# Altium PCB PCB1.PcbDoc
Units mm, origin at the board's own origin, x right, y up, seen from the top; angles counter-clockwise.
Board outline 83.69 x 43.94 mm, 2 copper layers (Top Layer, Bottom Layer); 27 components, 36 nets, 110 pads, 2 vias.
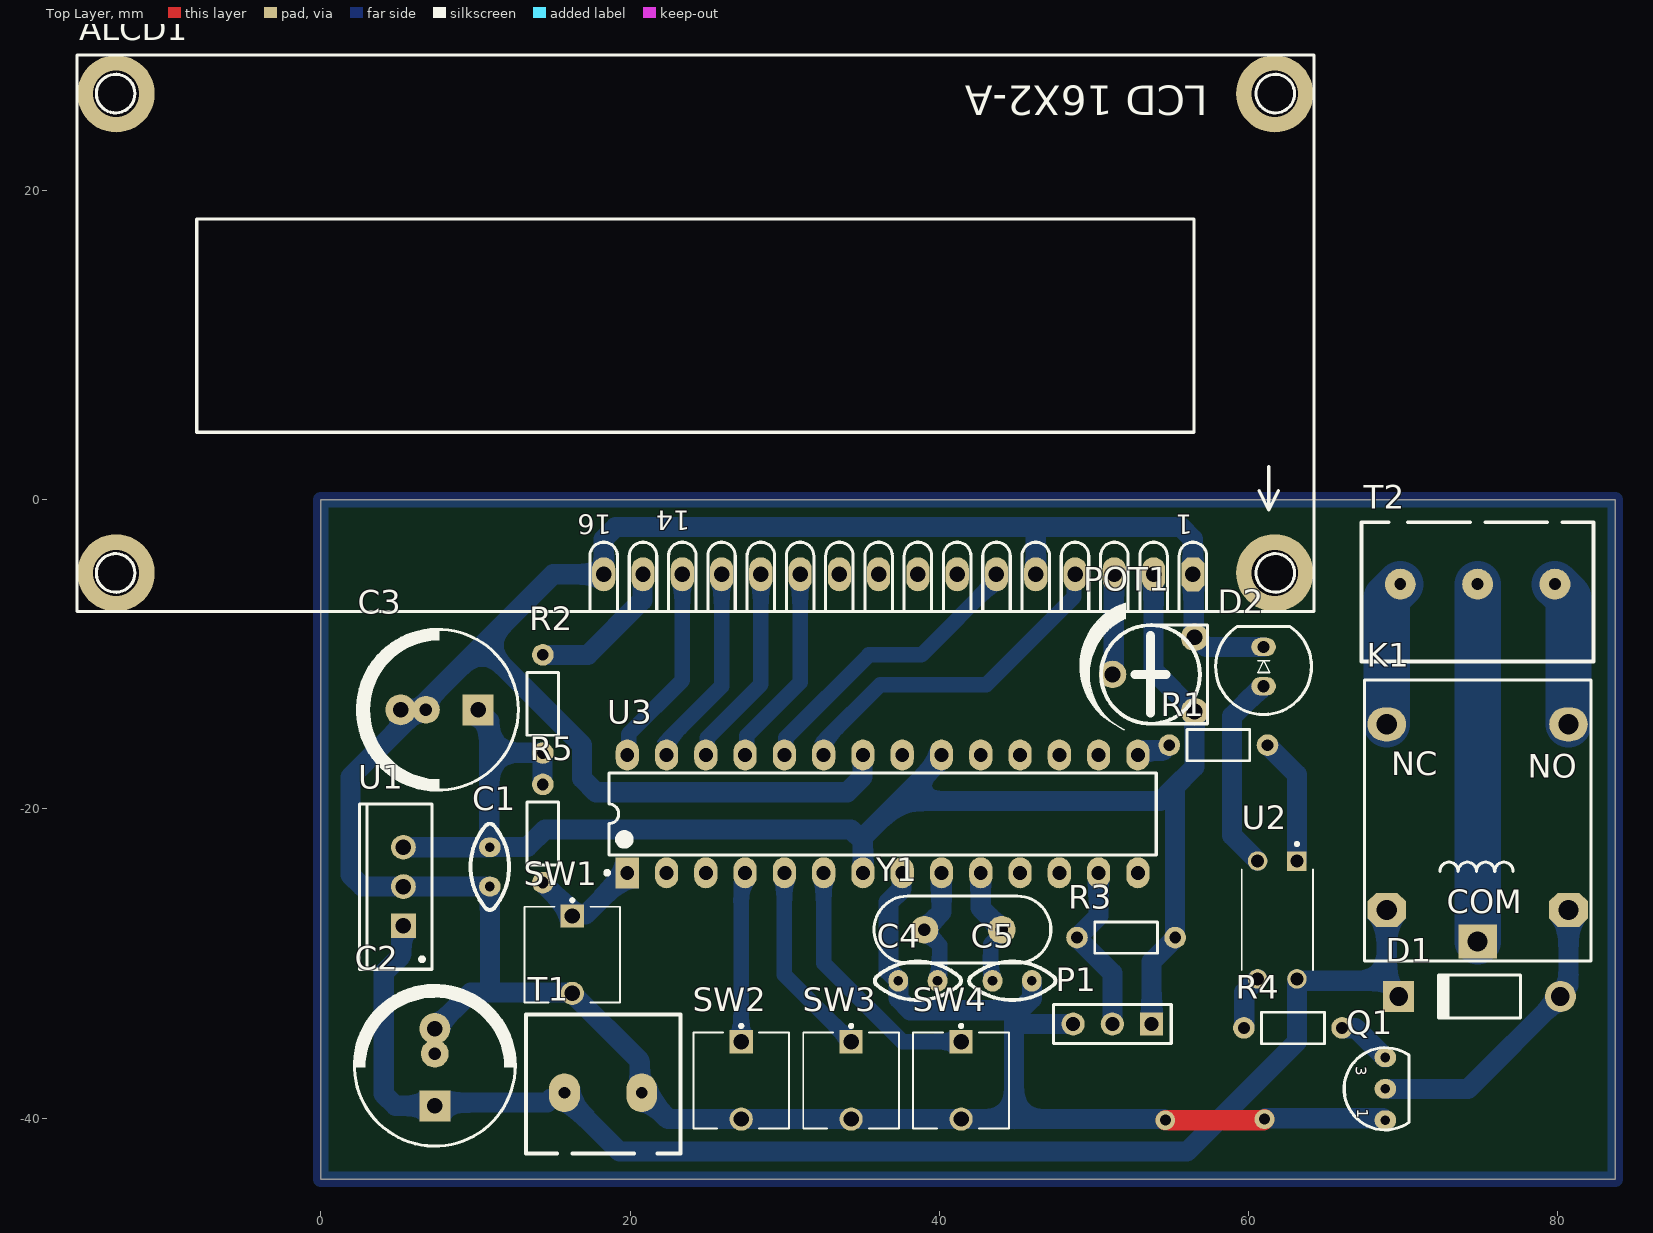
[diagram p0: Top Layer view]
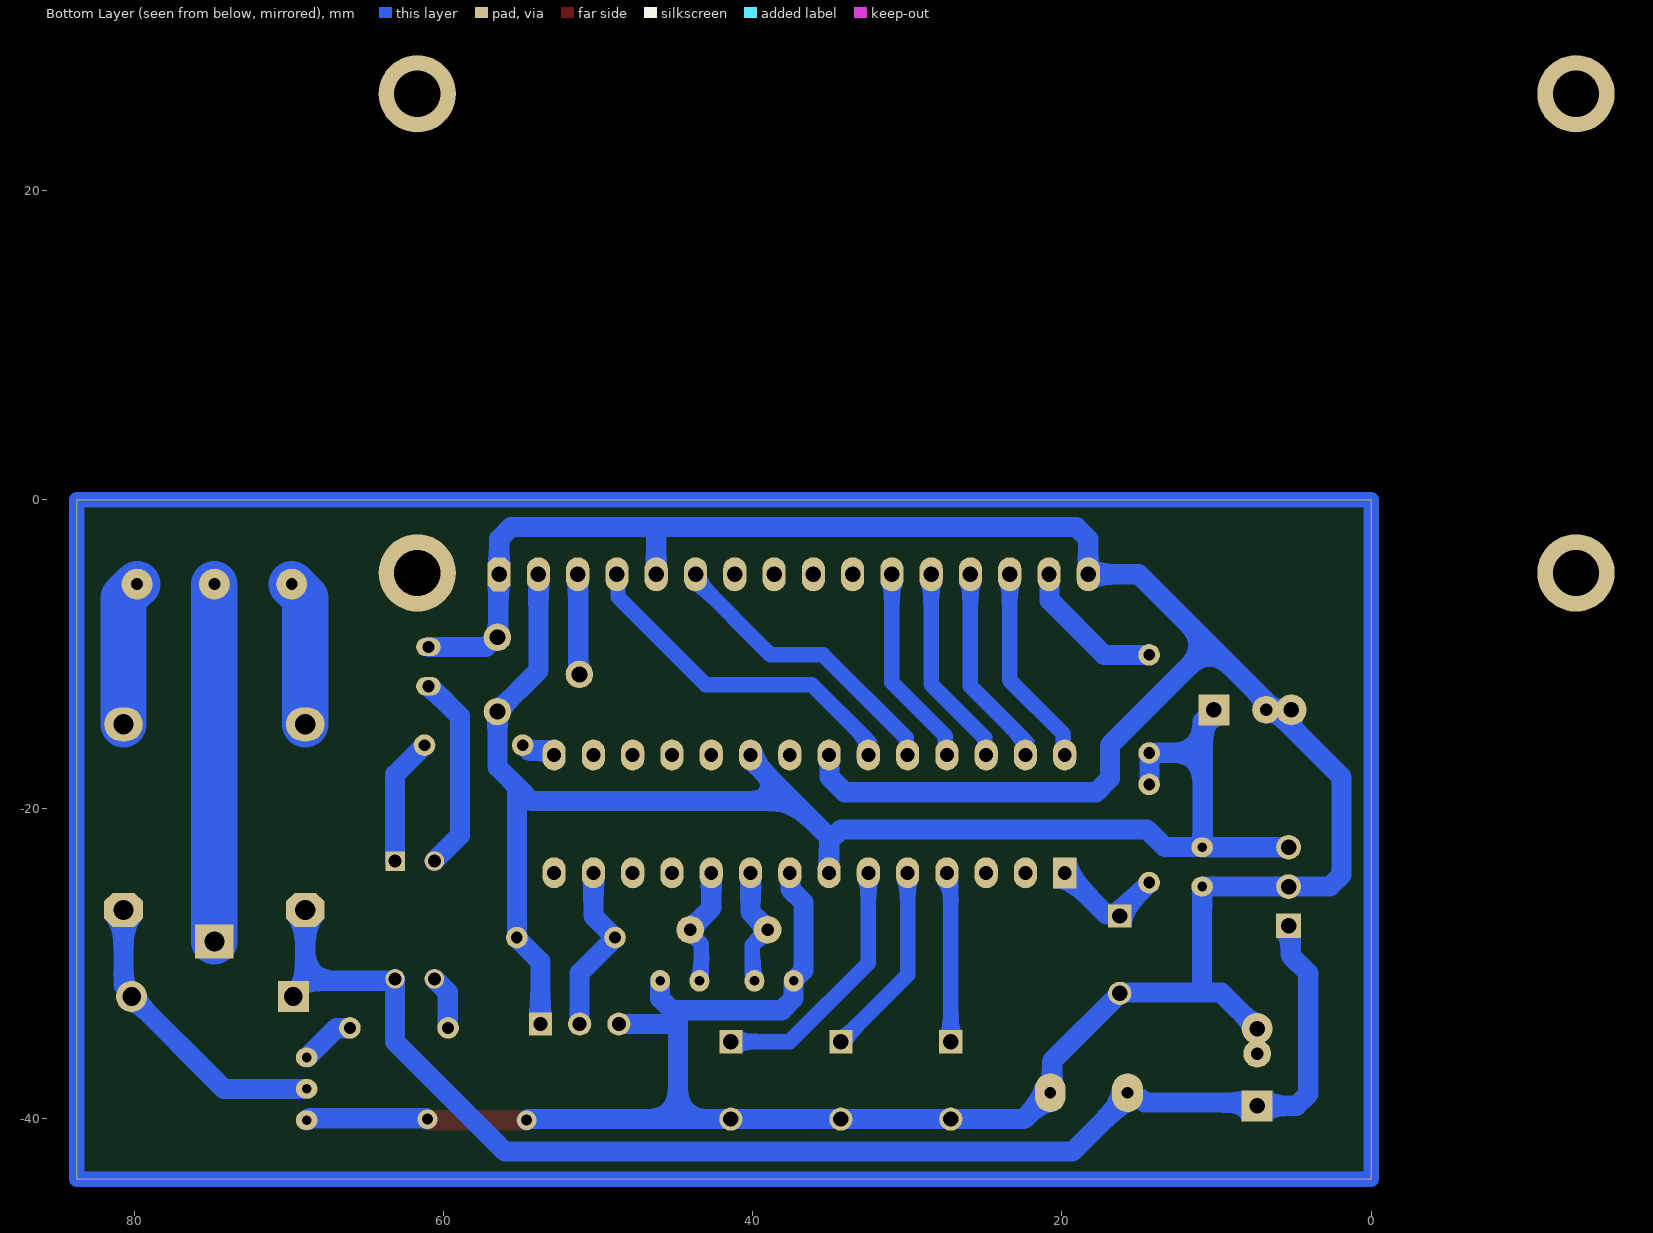
[diagram p1: Bottom Layer view, seen from below]
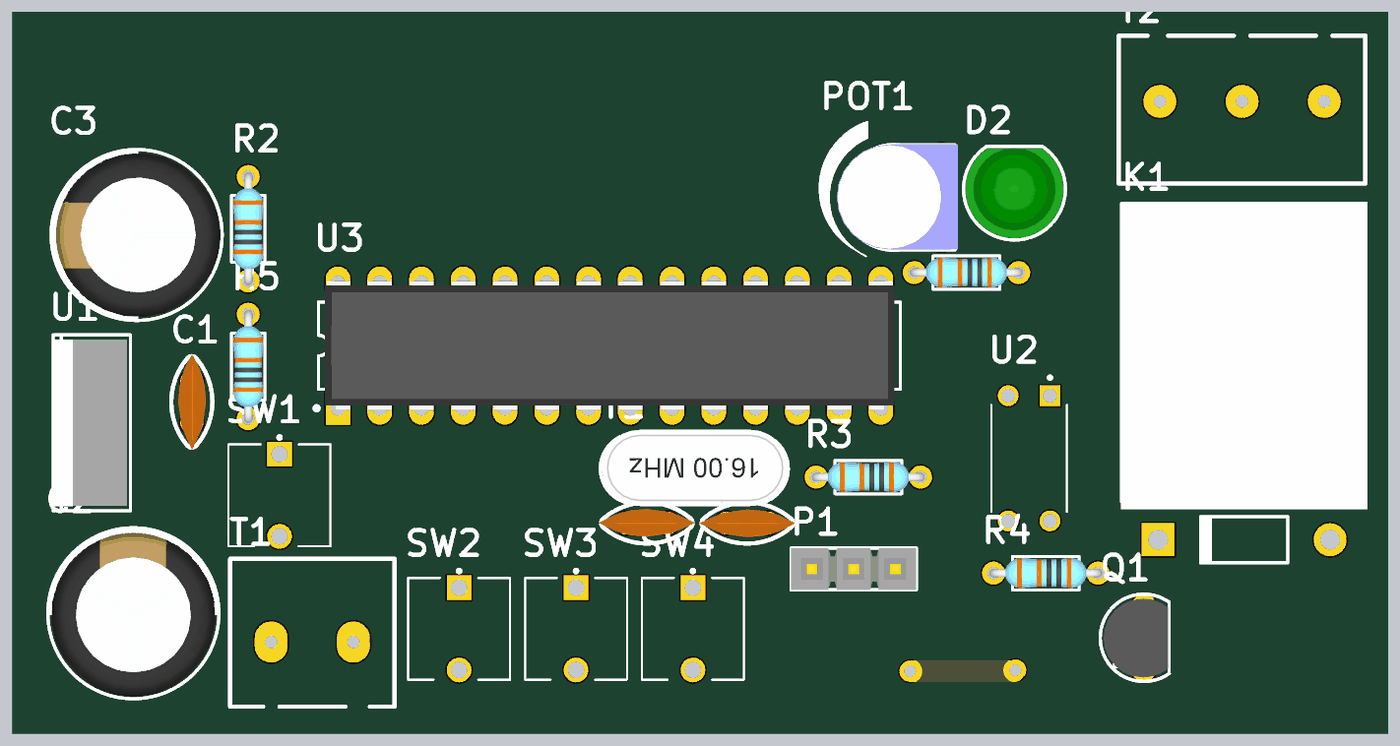
[diagram p2: 3D render of the assembled board from above, using the file's embedded part models]

## Layer stack, top to bottom
Top Solder: solder mask 0.0102, Solder Resist, Dk 3.5
Top Layer: signal copper 0.0356
Dielectric 1: dielectric 0.32, FR-4, Dk 4.8
Bottom Layer: signal copper 0.0356
Bottom Solder: solder mask 0.0102, Solder Resist, Dk 3.5

## Board outline
0,-43.942 83.693,-43.942 83.693,0 0,0

## Design rules (kind name [scope] priority, off if disabled: settings)
Clearance [All] p1: gap=0.254 ignorepadtopadclearanceinfootprint=FALSE except(0: Arc-Hole Track-Hole SMDPad-Hole THPad-Hole Via-Hole Fill-Hole Poly-Hole Region-Hole Text-Hole)
PolygonConnect [All] p1: connectstyle=Relief reliefconductorwidth=0.254 reliefentries=4 polygonreliefangle="90 Angle" airgapwidth=0.254
RoutingVias [All] p1: holewidth=0.711 width=1.27 viastyle="Through Hole" minholewidth=0.711 minwidth=1.27 maxholewidth=0.711 maxwidth=1.27
SolderMaskExpansion [All] p1: expansion=0.102 istentingtop=FALSE
Width [All] p1: maxlimit=3 minlimit=1 preferedwidth=1.3
30 further rules are at their usual default settings.

## Components (designator, comment, footprint, x,y, rotation, side; value= is the part's Value field where it differs from the comment)
ALCD1 "LCD" LCD_2X16 26.924,11.474 r180 top
C1 "100nF" Cap-100nF 10.922,-23.749 r90 top
C2 "1000uf" "Cap electrolitic radial 10x20-5" 7.366,-36.703 r90 top
C3 "1000uf" "Cap electrolitic radial 10x20-5" 7.66,-13.589 r180 top
C4 "22pf" Cap-100nF 38.608,-31.115 r180 top
C5 "22pf" Cap-100nF 44.704,-31.115 r0 top
D1 "Diode 1N4007" DO-41 74.93,-32.131 r180 top
D2 "LED 5MM" LED5MM_GRN 60.96,-10.795 r90 top
K1 "" "Relay 18.85x15.35x15.70" 74.803,-21.55 r0 top
P1 "Header 3" HDR1X3 53.721,-33.909 r180 top
POT1 "10K" "POT 4" 53.848,-11.303 r90 top
Q1 "C945" C945 68.834,-38.1 r270 top
R1 "1K" RES-(1/4) 58.039,-15.875 r180 top
R2 "220" RES-(1/4) 14.351,-13.208 r90 top
R3 "2.4K" RES-(1/4) 52.07,-28.321 r180 top
R4 "2.2K" RES-(1/4) 62.865,-34.163 r180 top
R5 "10K" RES-(1/4) 14.351,-21.59 r90 top
SW1 "FSM8JRT" TE_FSM8JRT 16.256,-26.924 r270 top
SW2 "FSM8JRT" TE_FSM8JRT 27.178,-35.052 r270 top
SW3 "FSM8JRT" TE_FSM8JRT 34.29,-35.052 r270 top
SW4 "FSM8JRT" TE_FSM8JRT 41.402,-35.052 r270 top
T1 "Terminal" "Terminal 1*2" 13.255,-42.291 r0 top
T2 "Terminal" "Terminal 1*3" 82.303,-1.461 r180 top
U1 "L7805CV" "TO-220 AB" 5.334,-25.019 r90 top
U2 "PC817X3NSZ1B" DIP762W50P254L495H455Q4 61.849,-27.178 r270 top
U3 "ATmega328A-PU" 28P3 36.322,-20.32 r90 top
Y1 "16 MHz" "XTAL 16MHZ" 41.529,-27.813 r180 top value="12 MHz"

## Footprints (in the part's own frame and the unit in brackets; to place one, negate y for a bottom-side part, rotate by r counter-clockwise, add the part's x,y. Pads: shape width x height; smd on the part's side, far side on the other; paste and mask are expansions set on the pad)
28P3 [mm] "DIP, 28-Leads, Row Spacing 7.62mm, Pitch 2.54mm, Body 34.67x7.3mm"
  rect 2x1.5 hole 0.9: 1(-3.81,16.51)
  oval 2x1.5 hole 0.9: 2(-3.81,13.97) 3(-3.81,11.43) 4(-3.81,8.89) 5(-3.81,6.35) 6(-3.81,3.81) 7(-3.81,1.27) 8(-3.81,-1.27) 9(-3.81,-3.81) 10(-3.81,-6.35) 11(-3.81,-8.89) 12(-3.81,-11.43) 13(-3.81,-13.97) 14(-3.81,-16.51) 15(3.81,-16.51) 16(3.81,-13.97) 17(3.81,-11.43) 18(3.81,-8.89) 19(3.81,-6.35) 20(3.81,-3.81) 21(3.81,-1.27) 22(3.81,1.27) 23(3.81,3.81) 24(3.81,6.35) 25(3.81,8.89) 26(3.81,11.43) 27(3.81,13.97) 28(3.81,16.51)
  silkscreen extent -3.93,-17.7 2.65,17.93, body extent -3.95,-17.35 3.95,17.3, height 5.04
C945 [mil] "NPN Transistor"
  oval 50x55 hole 25: 1(80,0) 2(0,0) 3(-80,0)
  silkscreen extent -105,-105 105,61, body extent -94,-96 95,58, height 315
"Cap electrolitic radial 10x20-5" [mm] "Cap electrolitic radial 10x20-5-Design:Abbas Basereh"
  rect 2x2 hole 1: 1(-2.5,0)
  round 1.8 hole 0.8: 2(0.875,0)
  round 2 hole 1: 2(2.5,0)
  silkscreen extent -5.1,-5.2 5.3,5.2, body extent -5,-5 5,5, height 20
Cap-100nF [mil] "Bipolar Capacitor-Design:Ali Hafizi"
  oval 50x55 hole 25: 1(-50,0) 2(50,0)
  silkscreen extent -110,-49 110,49, body extent -115,-34 115,33, height 272
DIP762W50P254L495H455Q4 [mm]
  rect 1.26x1.26 hole 0.84: 1(-3.81,1.27)
  round 1.26 hole 0.84: 2(-3.81,-1.27) 3(3.81,-1.27) 4(3.81,1.27)
  silkscreen extent -5.01,-2.3 3.25,2.3
DO-41 [mm] "Diode, Axial; Body 5.2 x 2.7 mm (LxDia. max), Lead Dia. 0.86 mm (max)"
  round 2 hole 1.2: 1(-5.23,0)
  rect 2x2 hole 1.2: 2(5.23,0)
  silkscreen extent -2.65,-1.4 2.75,1.4
HDR1X3 [mm] "Connector; Header; 3 Position"
  rect 1.5x1.5 hole 0.9: 1(0,0)
  round 1.5 hole 0.9: 2(2.54,0) 3(5.08,0)
  silkscreen extent -1.27,-1.27 6.35,1.27, body extent -1.26,-1.27 6.36,1.27, height 8.38
LCD_2X16 [mm] "LCD 2x16 Alphanumberic-Designer Abbas Basereh"
  oct 1.5x2.2 hole 1: 1(-29.464,16.3)
  oval 1.5x2.2 hole 1: 2(-26.924,16.3) 3(-24.384,16.3) 4(-21.844,16.3) 5(-19.304,16.3) 6(-16.764,16.3) 7(-14.224,16.3) 8(-11.684,16.3) 9(-9.144,16.3) 10(-6.604,16.3) 11(-4.064,16.3) 12(-1.524,16.3) 13(1.016,16.3) 14(3.556,16.3) 15(6.096,16.3) 16(8.636,16.3)
  round 5 hole 3: ""(-34.756,-14.775) ""(-34.756,16.213) ""(40.174,-14.775) ""(40.174,16.213)
  silkscreen extent -37.3,-17.29 42.7,18.71, body extent -37.35,-17.4 42.8,18.8, height 21
LED5MM_GRN [mm] "LED 5MM THROUGH HOLE GREEN-Designer Abbas Basereh"
  oval 1.2x1.6 hole 0.8: 1(-1.27,0) 2(1.27,0)
  silkscreen extent -3.1,-3.1 2.6,3.1, body extent -3,-3 2.5,3, height 9.14
"POT 4" [mil] "Trimmer"
  round 70 hole 40: 1(-94.49,-104.33) 2(94.49,-104.33) 3(0,104.33)
  silkscreen extent -141,-138 181,187, body extent -125,-144 127,145, height 187
"Relay 18.85x15.35x15.70" [mm]
  rect 2.5x2.2 hole 1.3: 1(0,-7.025)
  oval 2.5x2.2 hole 1.3: 2(-5.875,7.025) 3(5.875,7.025)
  oct 2.5x2.2 hole 1.3: 4(-5.875,-4.975) 5(5.875,-4.975)
  silkscreen extent -7.32,-8.27 7.32,9.87, body extent -7.37,-8.71 7.63,9.98, height 15.7
RES-(1/4) [mil]
  round 55 hole 30: 1(-125,0) 2(125,0)
  silkscreen extent -80,-40 80,40, body extent -135,-36 135,36, height 115
TE_FSM8JRT [mil]
  rect 59x59 hole 39: 1(0,0)
  round 59 hole 39: 2(197,0)
  silkscreen extent -44,-122 221,122
"Terminal 1*2" [mil]
  oval 78.74x98.43 hole 30: 1(98.15,155) 2(295,155)
  silkscreen extent 0,0 394,354
"Terminal 1*3" [mm]
  round 2 hole 0.762: 1(2.5,4) 2(7.5,4) 3(12.5,4)
  silkscreen extent 0,0 15,9
"TO-220 AB" [mm] "Epoxy meets UL94, V0-Design:Abbas Basereh"
  rect 1.6x1.6 hole 1: 1(-2.54,0)
  round 1.6 hole 1: 2(0,0) 3(2.54,0)
  silkscreen extent -5.35,-1.85 5.35,2.85, body extent -5.08,-1.65 5.08,2.92, height 18.54
"XTAL 16MHZ" [mm] "Crystal Oscillator"
  round 1.8 hole 0.8: 1(-2.5,0) 2(2.5,0)
  silkscreen extent -5.67,-2.18 5.76,2.15, body extent -5.68,-2.38 5.67,2.27, height 0.99

## Part data
ALCD1: "Alphanumic LCD", Data=16-12-2016, Designer="Abbas Basereh"
C1 C4 C5: library part "CAP CERAMIC TOTAL SIZE", "CAP Ceramic Total", Designer="Ali Hafizi"
C2 C3: library part "Cap electrolitic radial 10x21", "Cap electrolitic radial", Data=16-12-2016, Designer="Abbas Basereh", Part. No=100U/50V
D1: "1 Amp General Purpose Rectifier", Code_JEDEC=DO-204-AL, ComponentLink1Description="Manufacturer Link", ComponentLink1URL=http://www.fairchildsemi.com/, ComponentLink2Description=Datasheet, ComponentLink2URL=http://www.fairchildsemi.com/ds/1N%2F1N4001.pdf, DatasheetVersion=1998, LatestRevisionDate=17-Jul-2002, LatestRevisionNote="Re-released for DXP Platform.", PackageDescription="Diode, Axial; Body 5.2 x 2.7 mm (LxDia. max), Lead Dia. 0.86 mm (max)", PackageReference=DO-41, PackageVersion=Aug-1999, Published=8-Jun-2000, Publisher="Altium Limited"
D2: "Light Emitting Diode", Data=16-12-2016, Designer="Abbas Basereh"
K1: library part RELAY_SPDT, "Single-Pole Dual-Throw Relay", ComponentLink1Description=Datasheet, Designer="Abbas Basereh", Mounting Technology=Through-Hole, Pin Count=0, Update Date=2017-3-1
P1: "Header, 3-Pin", LatestRevisionDate=17-Jul-2002, LatestRevisionNote="Re-released for DXP Platform.", Publisher="Altium Limited"
POT1: library part POT, "Variable Resistor"
Q1: "NPN Transistor", Company="IPA CO", Designer="Saeid Jorablo", Last Update Time=2008/08/04
R1 R2 R3 R4 R5: library part "RES DIP PACKAGE", "TOTAL DIP RESISTOR PACK", Designer="Ali Hafizi"
SW1 SW2 SW3 SW4: "Switch Tactile OFF _ON_ SPST Round Button PC Pins 0.05A 12VDC 1.57N Thru-Hole Radial Tape", Contact_Current_Rating="50 mA", Package=None, Availability=Unavailable, Configuration_Pole-Throw="Single Pole - Single Throw", EU_RoHS_Compliance=Compliant, MF="TE Connectivity", MP=FSM8JRT, Price=None, SnapEDA_Link=https://www.snapeda.com/parts/FSM8JRT/TE%20Connectivity%20ALCOSWITCH%20Switches/view-part/226999/?ref=snap, TE_purchase_URL=https://www.te.com/usa-en/product-147694-1.html?te_bu=Cor&te_type=disp&te_campaign=seda_glo_cor-seda-global-disp-prtnr-fy19-seda-model-bom-cta_sma-317_1&elqCampaignId=32493
T1: library part "Terminal 1*2", "Terminal 2 Pin 250VAC 16A", ComponentLinkURL=www.picpars.com, Designer="Seyed Mohsen Ghasemain", E-mail=picpars@gmail.com
T2: library part "Terminal 1*3", "Terminal 3 Pin 250VAC 16A", ComponentLinkURL=www.picpars.com, Designer="Seyed Mohsen Ghasemain", E-mail=picpars@gmail.com
U1: library part "L7805CV-Linear Voltage Regulator", "Linear Voltage Regulator IC Positive FIXED Output 5V 1.5A TO-220AB", Manufacturer=STMicroelectronics, Designer="Abbas Basereh", Link=https://www.aliexpress.com/item/, Part. No=L7805CV
U2: "Optoisolator Transistor Output 1 Channel 4-DIP", Package=None, Availability=Good, Check_prices=https://www.snapeda.com/parts/PC817X3NSZ1B/Sharp%20Microelectronics/view-part/5163575/?ref=eda, MF="Sharp Microelectronics", MP=PC817X3NSZ1B, Price=None, Purchase-URL=https://pricing.snapeda.com/search/part/PC817X3NSZ1B/?ref=eda, SnapEDA_Link=https://www.snapeda.com/parts/PC817X3NSZ1B/Sharp%20Microelectronics/view-part/5163575/?ref=snap
U3: library part ATmega8A-PU, "8-bit AVR Microcontroller, 8KB Flash, 512 Bytes EEPROM, 1KB SRAM, 28-pin PDIP, Industrial Grade (-40°C to 85°C)", Supplier Part Number 1=ATMEGA8A-PU-ND, ComponentLink1Description="Manufacturer Link", ComponentLink1URL=http://www.atmel.com/products/avr/default.asp?, ComponentLink2Description="ATmega8A Datasheet", ComponentLink2URL=http://www.atmel.com/dyn/resources/prod_documents/doc8159.pdf, ComponentLink3Description="ATmega8A Summary", ComponentLink3URL=http://www.atmel.com/dyn/resources/prod_documents/8159S.pdf, ComponentLink4Description="Atmel.com Home", ComponentLink4URL=http://www.atmel.com, DatasheetVersion=2017-1-5, PackageDescription="28-lead (0.300\"/7.62mm Wide) Plastic Dual Inline Package (PDIP)", PackageReference=28P3, PackageVersion=2017-1-5, Published=2017-1-5, Publisher="Abbas Basereh", Supplier 1=Digi-Key, Supplier 2=Farnell, Supplier 3=Mouser, Supplier Part Number 2=1748534, Supplier Part Number 3=556-ATMEGA8A-PU
Y1: library part XTAL, "XTAL Crystal", ComponentLink1Description=Datasheet, ComponentLink2Description=Reference, Design Date=2017-1-3, Designer="ABBAS BASEREH", Mounting Technology="Surface Mount\Through-Hole", Status=Unreleased

## Via types
v1: diameter 1.27, hole 0.711, Top Layer to Bottom Layer, 2 vias

## Nets (pads, with @x,y where several pads share a name; then routed paths per layer and width w, separated by ;. In a path a pad name is that pad's centre, name@x,y a point inside that pad or via, vN(x,y) a via of type N, cw(c..) or ccw(c..) an arc to the next point about the centre after c; other vN are vias at no path point)
+5: ALCD1.2 C1.2 C3.1 P1.1 POT1.1 R2.1 R3.1 R5.2 U1.3 U3.7 U3.20 | length 104.4
  Bottom Layer w1.3: U1.3 C1.2@10.889,-22.479 ; C3.1 10.889,-14.318 10.889,-16.364 ; R5.2 14.332,-18.396 14.332,-16.428 14.319,-16.415 14.319,-16.378 14.306,-16.364 10.889,-16.364 ; U3.7 35.052,-22.098 ; U3.20 40.132,-16.76 37.399,-19.493 ; P1.1 53.721,-29.871 55.245,-28.347 R3.1 55.245,-18.923 55.054,-18.732 ; ALCD1.2 53.848,-11.053 POT1.1 56.498,-17.289 55.054,-18.732 ; C1.2@10.889,-22.479 10.889,-16.364 ; C1.2@10.889,-22.479 C1.2 10.937,-22.464 13.35,-22.464 14.478,-21.336 34.29,-21.336 35.052,-22.098 ; 35.052,-22.098 35.052,-21.84 37.399,-19.493 ; 37.399,-19.493 54.294,-19.493 55.054,-18.732
+12: C2.1 D1.2 K1.4 T1.1 U1.1 U2.4 | length 90.4
  Bottom Layer w1.3: U1.1 5.184,-27.709 5.184,-29.487 4.064,-30.607 4.064,-38.441 4.826,-39.203 C2.1 7.58,-38.989 14.636,-38.989 T1.1@14.888,-38.738 ; T1.1 15.748,-38.604 19.308,-42.164 56.007,-42.164 63.119,-35.052 U2.4@63.119,-31.217 ; U2.4 63.246,-31.115 68.928,-31.115 ; K1.4 68.928,-31.115 ; D1.2 69.35,-31.781 69.35,-31.537 68.928,-31.115
GND: ALCD1.1 ALCD1.5 ALCD1.16 C1.1 C2.2 C3.2 C4.2 C5.2 D2.2 P1.3 POT1.2 Q1.1 SW1.2 SW2.2 SW3.2 SW4.2 T1.2 U1.2 U3.8 U3.22 | length 228.5
  Top Layer w1.3: v1(54.61,-40.132) 60.96,-40.132 v1(61.023,-40.069)
  Bottom Layer w1.3: C2.2@7.366,-34.203 9.692,-31.877 10.922,-31.877 ; SW1.2 16.218,-31.89 16.078,-31.89 16.065,-31.877 10.922,-31.877 ; SW1.2@16.294,-31.966 20.614,-36.286 20.614,-38.22 T1.2 20.748,-38.415 21.287,-38.954 21.348,-38.954 22.45,-40.056 SW2.2 SW3.2 44.831,-40.056 ; U3.22 35.014,-16.548 35.014,-17.946 34.036,-18.923 17.78,-18.923 16.891,-18.034 16.891,-15.875 10.434,-9.418 ; C4.2@37.323,-31.067 36.703,-30.447 36.703,-26.035 37.554,-25.184 37.554,-24.168 U3.8 ; C4.2 37.353,-31.13 37.353,-32.258 38.115,-33.02 45.212,-33.02 ; C5.2 45.974,-32.258 45.212,-33.02 ; ALCD1.5 46.228,-2.032 45.974,-1.778 ; P1.3 45.085,-33.909 44.831,-34.163 ; v1(54.61,-40.132) 54.534,-40.056 44.831,-40.056 ; D2.2 57.249,-9.525 56.627,-8.903 POT1.2 56.443,-8.848 56.443,-4.881 ALCD1.1 56.388,-2.54 55.626,-1.778 45.974,-1.778 ; v1(61.023,-40.069) 61.087,-40.005 68.674,-40.005 68.786,-40.117 68.819,-40.117 Q1.1 ; 10.434,-9.418 1.905,-17.947 1.905,-24.257 2.667,-25.019 U1.2 C1.1 10.922,-31.877 ; 10.434,-9.418 15.026,-4.826 ALCD1.16 18.288,-2.54 19.05,-1.778 45.974,-1.778 ; 44.831,-40.056 44.831,-34.163 ; 44.831,-34.163 44.831,-33.401 45.212,-33.02
NetALCD1_3: ALCD1.3 POT1.3 | length 6.5
  Bottom Layer w1.3: POT1.3 51.27,-11.231 51.27,-4.864 ALCD1.3
NetALCD1_4: ALCD1.4 U3.23 | length 22.4
  Bottom Layer w1: U3.23 32.608,-16.414 32.608,-15.525 36.161,-11.972 43.019,-11.972 48.701,-6.29 48.701,-4.893 ALCD1.4
NetALCD1_6: ALCD1.6 U3.24 | length 19.4
  Bottom Layer w1: U3.24 30.068,-16.414 30.068,-15.398 35.433,-10.033 38.831,-10.033 43.688,-5.176 ALCD1.6
NetALCD1_11: ALCD1.11 U3.25 | length 13.2
  Bottom Layer w1: U3.25 27.528,-16.414 27.528,-15.271 30.988,-11.811 ALCD1.11
NetALCD1_12: ALCD1.12 U3.26 | length 13.2
  Bottom Layer w1: U3.26 24.988,-16.414 24.988,-15.398 28.448,-11.938 ALCD1.12
NetALCD1_13: ALCD1.13 U3.27 | length 13.2
  Bottom Layer w1: U3.27 22.448,-16.414 22.448,-15.525 25.908,-12.065 ALCD1.13
NetALCD1_14: ALCD1.14 U3.28 | length 13.2
  Bottom Layer w1: U3.28 19.893,-16.429 19.893,-15.159 23.368,-11.684 ALCD1.14
NetALCD1_15: ALCD1.15 R2.2 | length 9.6
  Bottom Layer w1.3: R2.2 17.272,-10.033 20.79,-6.515 20.79,-4.864 ALCD1.15
NetC4_1: C4.1 U3.9 Y1.2 | length 7.8
  Bottom Layer w1: Y1.2 39.029,-27.823 40.005,-28.799 40.005,-30.734 39.93,-30.809 39.93,-31.063 C4.1
  Bottom Layer w1.3: Y1.2@39.175,-27.728 39.175,-27.632 40.132,-26.674 U3.9
NetC5_1: C5.1 U3.10 Y1.1 | length 7.9
  Bottom Layer w1: C5.1 43.382,-31.063 43.382,-30.809 43.307,-30.734 43.307,-28.751 44.029,-28.029 Y1.1
  Bottom Layer w1.3: U3.10 42.672,-26.416 44.029,-27.773 Y1.1
NetD1_1: D1.1 K1.5 Q1.2 | length 19.6
  Bottom Layer w1.3: Q1.2 74.191,-38.1 D1.1 80.16,-31.942 80.678,-31.424 K1.5
NetD2_1: D2.1 U2.2 | length 12.7
  Bottom Layer w1.3: U2.2 58.928,-21.717 58.928,-13.997 D2.1@60.81,-12.115
NetK1_1: K1.1 T2.2 | length 23.1
  Bottom Layer w3: K1.1 T2.2
NetK1_2: K1.2 T2.3 | length 9.4
  Bottom Layer w3: K1.2 68.928,-6.336 T2.3
NetK1_3: K1.3 T2.1 | length 9.4
  Bottom Layer w3: T2.1 80.678,-6.336 K1.3
NetP1_2: P1.2 R3.2 U3.13 | length 11.3
  Bottom Layer w1.3: U3.13 50.292,-26.924 R3.2 51.181,-30.607 P1.2
NetQ1_3: Q1.3 R4.1 | length 3.6
  Bottom Layer w1.3: R4.1 66.059,-34.182 66.914,-34.182 68.801,-36.068 Q1.3
NetR1_1: R1.1 U2.1 | length 8.3
  Bottom Layer w1.3: R1.1 63.119,-17.78 U2.1
NetR1_2: R1.2 U3.15 | length 2.4
  Bottom Layer w1.3: U3.15 52.832,-16.314 52.924,-16.222 54.491,-16.222 54.838,-15.875 R1.2
NetR4_2: R4.2 U2.3 | length 3.5
  Bottom Layer w1.3: R4.2 59.709,-34.144 59.709,-31.858 U2.3
NetR5_1: R5.1 SW1.1 U3.1 | length 6.9
  Bottom Layer w1.3: R5.1 14.351,-24.791 16.157,-26.597 16.157,-26.825 SW1.1 ; 17.117,-26.825 19.462,-24.48 19.712,-24.48 19.812,-24.38 U3.1
NetSW2_1: SW2.1 U3.4 | length 11
  Bottom Layer w1: SW2.1 27.178,-24.769 27.432,-24.515 U3.4
NetSW3_1: SW3.1 U3.5 | length 12.7
  Bottom Layer w1: U3.5 29.972,-30.734 SW3.1
NetSW4_1: SW4.1 U3.6 | length 16.8
  Bottom Layer w1: U3.6 32.512,-29.972 37.592,-35.052 SW4.1
NetU3_2: U3.2
NetU3_3: U3.3
NetU3_11: U3.11
NetU3_12: U3.12
NetU3_14: U3.14
NetU3_16: U3.16
NetU3_17: U3.17
NetU3_18: U3.18
NetU3_19: U3.19
pads on no net: ALCD1. ALCD1.7 ALCD1.8 ALCD1.9 ALCD1.10 U3.21
copper on no net: | length 255.3
  Bottom Layer w1: 0,-43.942 0,0 83.693,0 83.693,-43.942 0,-43.942

## Text inside footprints (layer, text, board x,y; h text height)
ALCD1: Top Overlay "14" at 23.876,-0.718 h1.27 r180; Top Overlay "1" at 56.388,-0.972 h1.27 r180; Top Overlay "16" at 18.796,-0.972 h1.27 r180; Top Overlay "LCD 16X2-A" at 57.362,26.757 h1.91 r180
K1: Top Overlay "COM" at 72.822,-26.732 h1.5; Top Overlay "NO" at 78.054,-17.994 h1.5; Top Overlay "NC" at 69.215,-17.816 h1.5
Q1: Top Overlay "1" at 67.024,-39.395 h0.7 r270; Top Overlay "3" at 66.929,-36.627 h0.7 r270